# Altium PCB PCB_Testplatine.PcbDoc (part 3 of 3)
Units mm, origin at the board's own origin, x right, y up, seen from the top; angles counter-clockwise.
Board outline 124.77 x 137.35 mm, 2 copper layers (Top Layer, Bottom Layer); 215 components, 185 nets, 1105 pads, 469 vias.
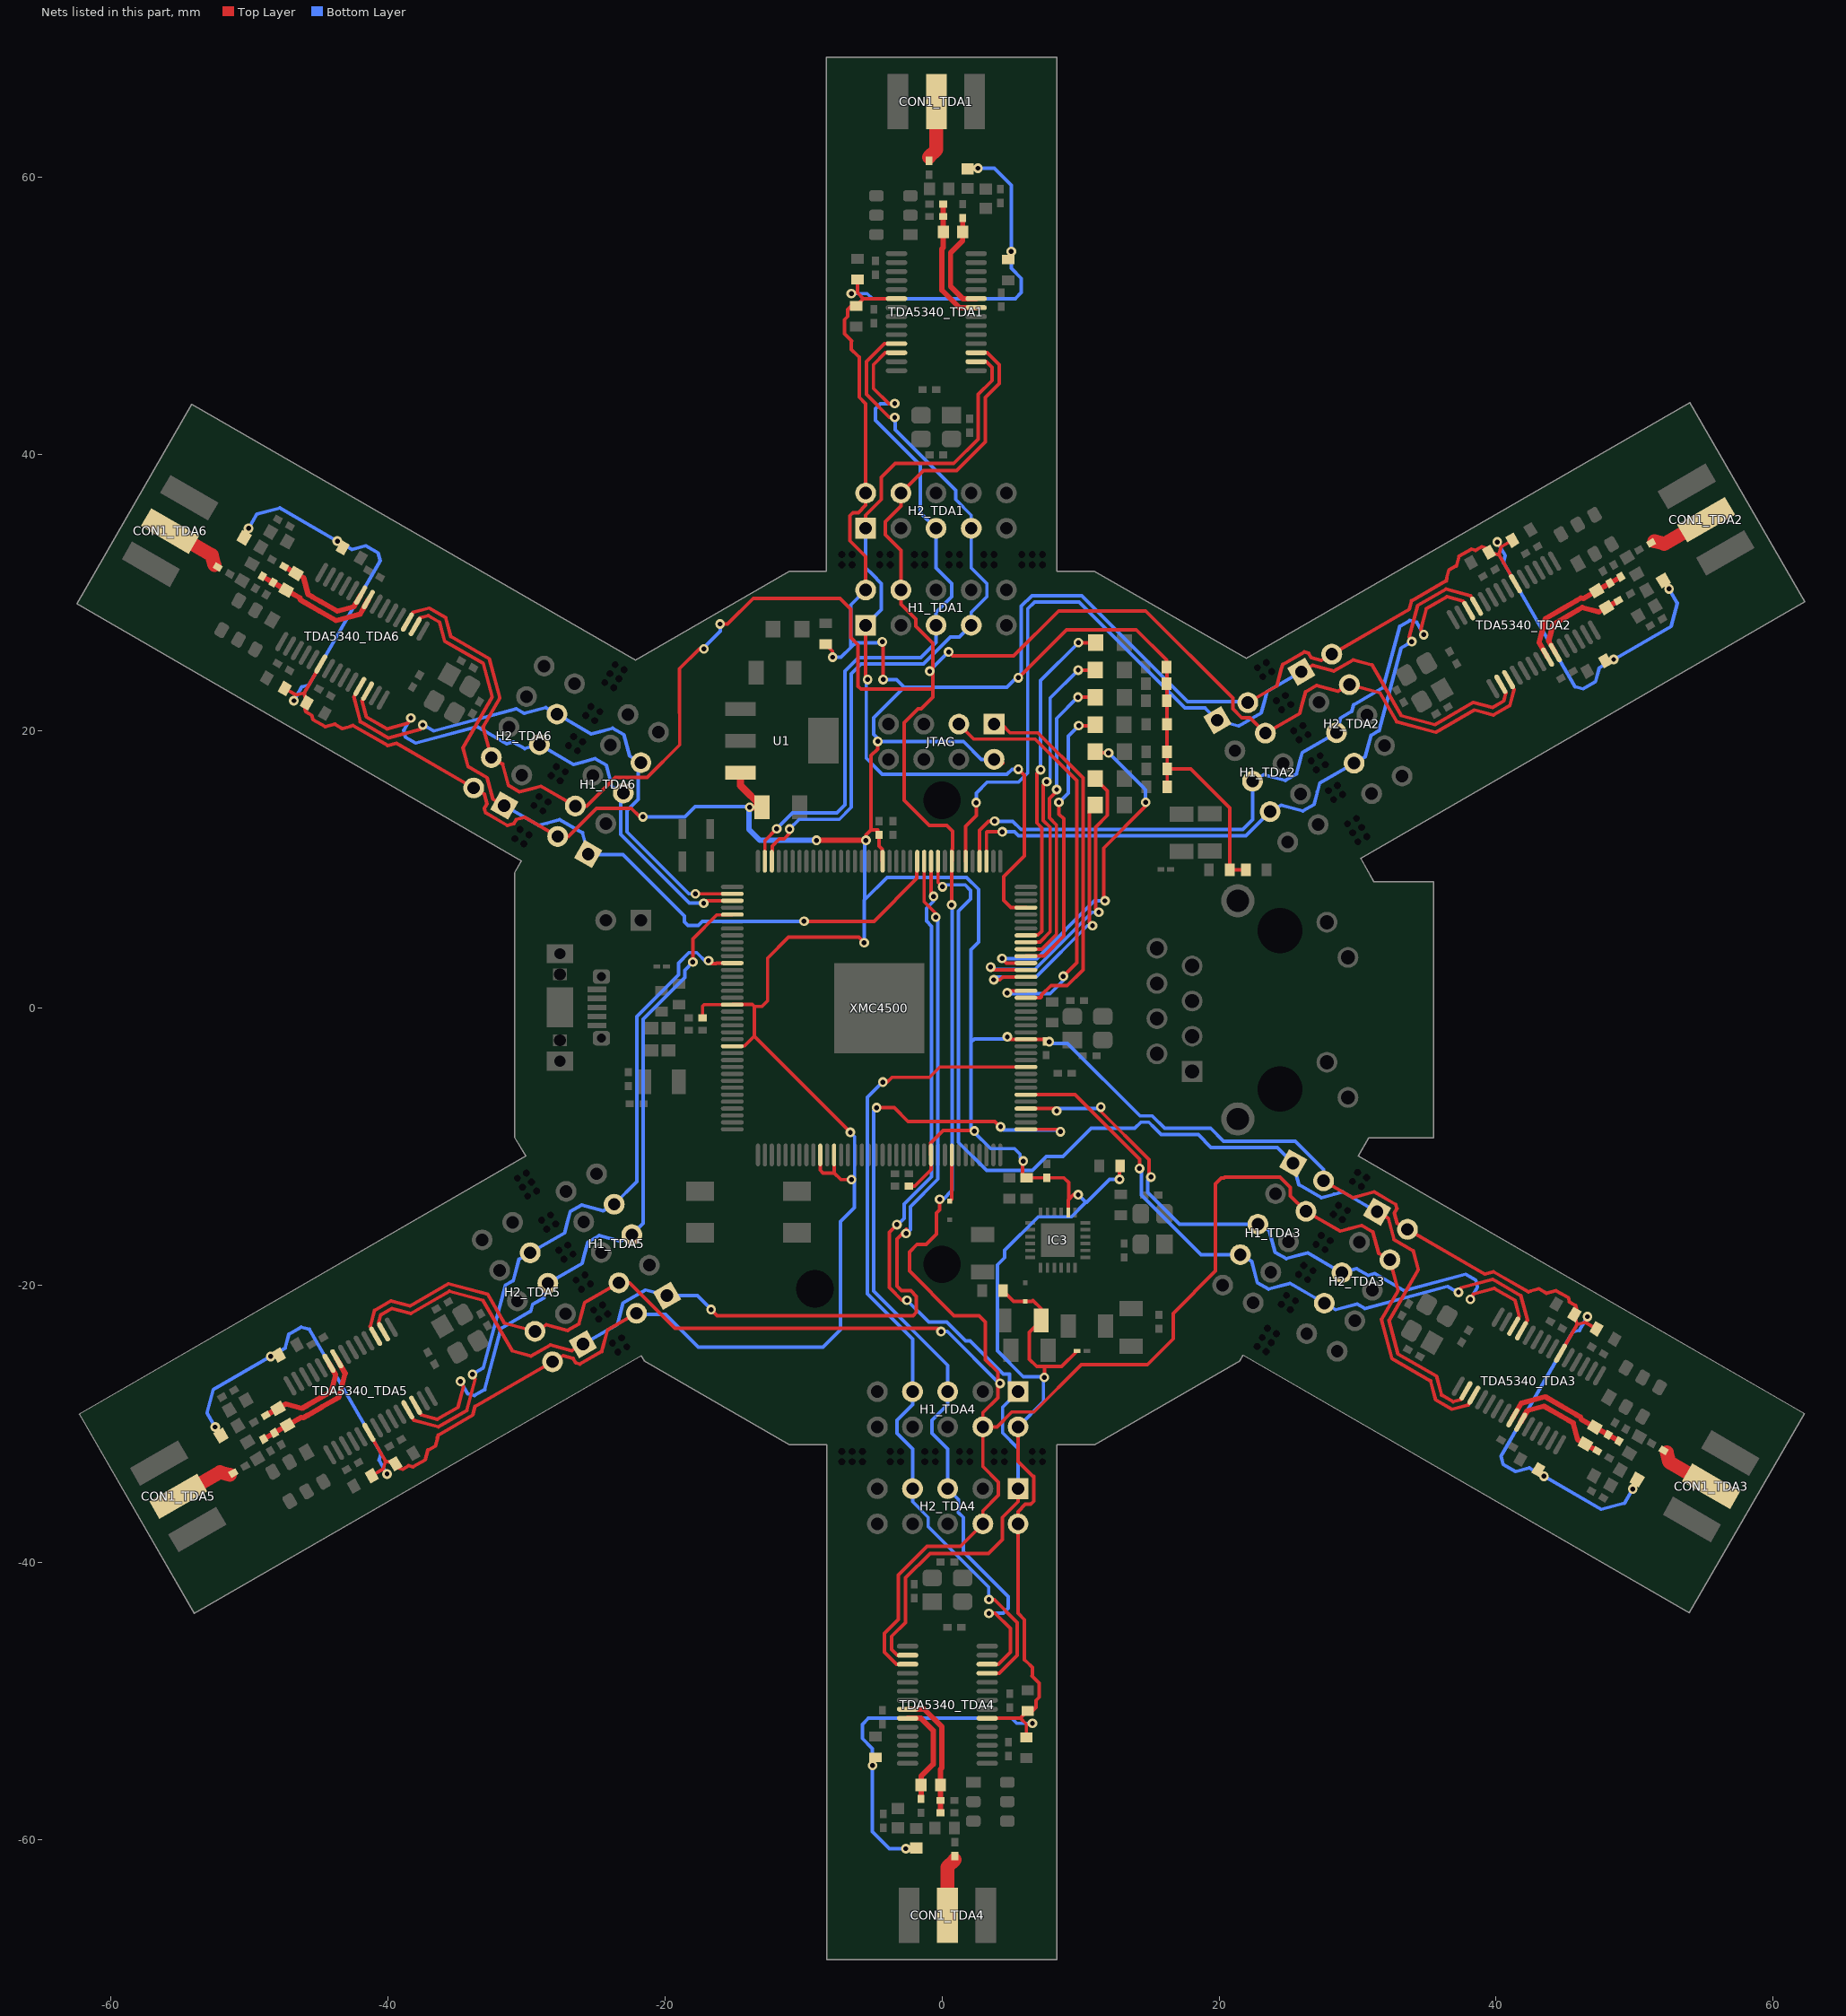
[diagram p3: the nets of this part, all layers, seen from the top]

## Via types
v1: diameter 0.7, hole 0.35, Top Layer to Bottom Layer, 421 vias
v2: diameter 0.5, hole 0.35, Top Layer to Bottom Layer, 36 vias
v3: diameter 2.7, hole 2.5, Top Layer to Bottom Layer, 12 vias

## Nets (pads, with @x,y where several pads share a name; then routed paths per layer and width w, separated by ;. In a path a pad name is that pad's centre, name@x,y a point inside that pad or via, vN(x,y) a via of type N, cw(c..) or ccw(c..) an arc to the next point about the centre after c; other vN are vias at no path point) (continued)
PP1_TDA1: H1_TDA1.7 H2_TDA1.7 TDA5340_TDA1.11 XMC4500.142 | length 54.2
  Top Layer w0.254: XMC4500.142@-12.3,10.6 -12.277,10.623 -12.277,11.69 -11.761,12.206 -11.406,12.206 -11.02,12.592 v1(-11.02,12.92) ; v1(-3.42,42.64) -3.802,42.64 -5.467,44.305 -5.467,46.666 -4.168,47.965 TDA5340_TDA1.11@-3.295,47.965
  Bottom Layer w0.254: v1(-11.02,12.92) -10.313,13.627 -7.424,13.627 -6.554,14.497 -6.554,24.145 -5.848,24.851 -1.346,24.851 0.59,26.787 1.247,26.787 H1_TDA1.7@2.1,27.64 2.1,28.581 3.231,29.712 3.231,30.648 2.1,31.779 H2_TDA1.7@2.1,34.64 2.1,35.581 0.969,36.712 0.969,37.37 -3.401,41.74 v1@-3.401,42.62 ; v1@-3.42,42.321 v1(-3.42,42.64)
PP1_TDA2: H1_TDA2.7 H2_TDA2.7 TDA5340_TDA2.11 XMC4500.111 | length 49.8
  Top Layer w0.254: XMC4500.111@3.2,10.6 3.2,12.69 3.24,12.73 v1(4.34,12.73) ; v1(33.911,26.46) 33.72,26.791 34.329,29.066 36.374,30.246 38.148,29.771 TDA5340_TDA2.11@38.585,29.014
  Bottom Layer w0.254: v1(4.34,12.73) 5.21,12.73 5.506,12.434 21.935,12.434 H1_TDA2.7@23.68,14.18 24.495,14.65 26.04,14.236 26.851,14.704 27.094,15.609 27.265,16.249 H2_TDA2.7@29.742,17.68 30.557,18.15 30.971,19.695 31.542,20.024 33.141,25.993 v1@33.904,26.434 ; v1@33.634,26.3 v1(33.911,26.46)
PP1_TDA3: H1_TDA3.7 H2_TDA3.7 TDA5340_TDA3.11 XMC4500.78 | length 48
  Top Layer w0.254: XMC4500.78@6.05,-6.25 9.605,-6.25 14.25,-10.895 v1(14.25,-11.58) ; v1(37.28,-20.52) 37.471,-20.189 39.746,-19.58 41.791,-20.76 42.266,-22.534 TDA5340_TDA3.11@41.829,-23.291
  Bottom Layer w0.254: v1(14.25,-11.58) 14.397,-11.727 14.397,-13.495 18.702,-17.8 H1_TDA3.7@21.53,-17.8 22.345,-18.271 22.758,-19.816 23.57,-20.284 24.475,-20.042 25.115,-19.87 H2_TDA3.7@27.592,-21.3 28.407,-21.771 29.952,-21.357 30.522,-21.686 36.491,-20.087 v1@37.254,-20.527 ; v1@37.004,-20.36 v1(37.28,-20.52)
PP1_TDA4: H1_TDA4.7 H2_TDA4.7 TDA5340_TDA4.11 XMC4500.82 | length 61.3
  Top Layer w0.254: v1(-4.28,-5.34) -3.965,-5.34 -3.621,-4.996 -3.615,-4.996 -3.613,-4.994 -0.912,-4.994 -0.168,-4.25 XMC4500.82@6.05,-4.25 ; TDA5340_TDA4.11@3.255,-48.015 4.128,-48.015 5.427,-46.716 5.427,-44.355 3.762,-42.69 v1(3.38,-42.69)
  Bottom Layer w0.254: v1(-4.28,-5.34) -4.307,-5.34 -5.411,-6.444 -5.411,-20.623 -2.14,-23.894 -2.14,-28.631 -3.271,-29.762 -3.271,-30.698 -2.14,-31.829 -2.14,-35.631 -1.009,-36.762 -1.009,-37.42 3.361,-41.79 v1@3.361,-42.67 ; v1(3.38,-42.69) v1@3.38,-42.371
PP1_TDA5: H1_TDA5.7 H2_TDA5.7 TDA5340_TDA5.11 XMC4500.12 | length 50.3
  Top Layer w0.254: TDA5340_TDA5.11@-38.584,-28.996 -38.148,-29.752 -36.374,-30.227 -34.329,-29.047 -33.72,-26.772 v1(-33.91,-26.441) ; v1(-16.87,3.43) -16.644,3.204 -16.336,3.204 -16.29,3.25 XMC4500.12@-15.15,3.25
  Bottom Layer w0.254: v1(-33.91,-26.441) v1@-33.634,-26.282 ; v1@-33.903,-26.415 -33.141,-25.974 -31.541,-20.006 -30.971,-19.676 -30.557,-18.131 H2_TDA5.7@-29.742,-17.661 -27.265,-16.231 -27.093,-15.591 -26.851,-14.686 -26.039,-14.217 -24.495,-14.631 H1_TDA5.7@-23.68,-14.161 -22.048,-12.529 -22.048,-0.61 -19.044,2.394 -19.044,3.243 -18.28,4.007 -17.72,4.007 -17.034,3.321 -16.979,3.321 v1(-16.87,3.43)
PP1_TDA6: H1_TDA6.7 H2_TDA6.7 TDA5340_TDA6.11 XMC4500.2 | length 41.2
  Top Layer w0.254: TDA5340_TDA6.11@-42.049,23.211 -42.486,22.454 -42.011,20.68 -39.966,19.5 -37.691,20.109 v1(-37.5,20.44) ; v1(-17.82,8.25) XMC4500.2@-15.15,8.25
  Bottom Layer w0.254: v1(-37.5,20.44) v1@-37.224,20.28 ; v1@-37.474,20.447 -36.711,20.007 -30.742,21.606 -30.172,21.277 -28.627,21.691 H2_TDA6.7@-27.812,21.22 -25.335,19.79 -24.695,19.962 -23.79,20.204 -22.978,19.736 -22.565,18.191 H1_TDA6.7@-21.75,17.72 -21.943,17.527 -21.943,15.074 -22.751,14.266 -22.751,12.719 -18.282,8.25 v1(-17.82,8.25)
PP2_TDA1: H1_TDA1.5 H2_TDA1.5 TDA5340_TDA1.12 XMC4500.143 | length 52.3
  Top Layer w0.254: XMC4500.143@-12.8,10.6 -12.8,12.097 v1(-11.947,12.95) ; v1(-3.42,43.64) -3.857,43.64 -4.959,44.742 -4.959,46.456 -4.1,47.315 TDA5340_TDA1.12@-3.295,47.315
  Bottom Layer w0.254: v1(-11.947,12.95) -10.816,14.081 -7.612,14.081 -7.008,14.685 -7.008,24.333 -6.037,25.305 -1.535,25.305 -0.44,26.399 H1_TDA1.5@-0.44,27.64 -0.44,28.581 0.691,29.712 0.691,30.648 -0.44,31.779 H2_TDA1.5@-0.44,34.64 -1.571,35.771 -1.571,39.191 -4.812,42.432 -4.812,43.274 -4.446,43.64 v1(-3.42,43.64)
PP2_TDA2: H1_TDA2.5 H2_TDA2.5 TDA5340_TDA2.12 XMC4500.112 | length 51.2
  Top Layer w0.254: XMC4500.112@2.7,10.6 2.7,12.832 3.358,13.49 v1(3.79,13.49) ; v1(34.777,26.96) 34.558,27.338 34.962,28.844 36.446,29.701 37.619,29.386 TDA5340_TDA2.12@38.022,28.689
  Bottom Layer w0.254: v1(3.79,13.49) 5.092,13.49 5.694,12.888 21.703,12.888 22.41,13.595 H1_TDA2.5@22.41,16.379 23.225,16.85 24.77,16.436 25.581,16.904 25.824,17.809 25.995,18.449 H2_TDA2.5@28.472,19.879 28.758,20.945 29.572,21.415 29.701,21.895 31.848,23.134 33.035,27.562 33.764,27.983 34.264,27.849 v1(34.777,26.96)
PP2_TDA3: H1_TDA3.5 H2_TDA3.5 TDA5340_TDA3.12 XMC4500.76 | length 48.1
  Top Layer w0.254: XMC4500.76@6.05,-7.25 6.06,-7.26 8.27,-7.26 v1(8.27,-7.43) ; v1(11.46,-7.14) 11.358,-7.242 11.358,-7.362 14.927,-10.93 14.927,-12.049 v1(15.074,-12.196) ; v1(38.146,-21.02) 38.365,-20.641 39.87,-20.238 41.354,-21.095 41.669,-22.269 TDA5340_TDA3.12@41.267,-22.966
  Bottom Layer w0.254: v1(8.27,-7.43) 8.27,-7.39 8.42,-7.24 11.36,-7.24 v1(11.46,-7.14) ; v1(15.074,-12.196) 14.851,-12.419 14.851,-13.307 17.145,-15.601 H1_TDA3.5@22.8,-15.601 23.615,-16.071 24.028,-17.616 24.84,-18.084 25.745,-17.842 26.385,-17.67 H2_TDA3.5@28.862,-19.101 29.928,-18.815 30.742,-19.285 31.222,-19.157 33.369,-20.397 37.796,-19.21 38.526,-19.631 38.659,-20.131 v1(38.146,-21.02)
PP2_TDA4: H1_TDA4.5 H2_TDA4.5 TDA5340_TDA4.12 XMC4500.73 | length 65.1
  Top Layer w0.254: v1(-4.73,-7.19) -3.46,-7.19 -2.47,-8.18 3.79,-8.18 4.18,-8.57 v1(4.22,-8.57) ; TDA5340_TDA4.12@3.255,-47.365 4.06,-47.365 4.919,-46.506 4.919,-44.792 3.817,-43.69 v1(3.38,-43.69) ; XMC4500.73@6.05,-8.75 8.45,-8.75 8.538,-8.838 v1(8.538,-8.927)
  Bottom Layer w0.254: v1(-4.73,-7.19) -4.957,-7.417 -4.957,-20.435 0.396,-25.788 0.396,-27.686 H1_TDA4.5@0.4,-27.69 0.4,-28.631 -0.731,-29.762 -0.731,-30.698 0.4,-31.829 H2_TDA4.5@0.4,-34.69 1.18,-35.47 1.18,-36.411 1.531,-36.762 1.531,-39.241 4.772,-42.482 4.772,-43.324 4.406,-43.69 v1(3.38,-43.69) ; v1(4.22,-8.57) 4.22,-8.6 4.42,-8.8 8.411,-8.8 v1(8.538,-8.927)
PP2_TDA5: H1_TDA5.5 H2_TDA5.5 TDA5340_TDA5.12 XMC4500.5 | length 52.4
  Top Layer w0.254: TDA5340_TDA5.12@-38.022,-28.671 -37.619,-29.367 -36.445,-29.682 -34.961,-28.825 -34.558,-27.32 v1(-34.776,-26.941) ; v1(-18,3.33) -18,5.008 -16.281,6.727 XMC4500.5@-15.173,6.727
  Bottom Layer w0.254: v1(-34.776,-26.941) -34.263,-27.83 -33.764,-27.964 -33.034,-27.543 -31.848,-23.116 -29.701,-21.876 -29.572,-21.396 -28.758,-20.926 H2_TDA5.5@-28.472,-19.861 -25.995,-18.43 -25.823,-17.79 -25.581,-16.885 -24.769,-16.417 -23.225,-16.831 H1_TDA5.5@-22.41,-16.361 -21.594,-15.545 -21.594,-0.798 -18.59,2.206 -18.59,2.74 v1(-18,3.33)
PP2_TDA6: H1_TDA6.5 H2_TDA6.5 TDA5340_TDA6.12 XMC4500.3 | length 38.8
  Top Layer w0.254: TDA5340_TDA6.12@-41.487,22.886 -41.889,22.189 -41.574,21.015 -40.09,20.158 -38.585,20.561 v1(-38.366,20.94) ; v1(-17.22,7.57) -17.04,7.75 XMC4500.3@-15.15,7.75
  Bottom Layer w0.254: v1(-38.366,20.94) -38.879,20.051 -38.746,19.551 -38.016,19.13 -33.589,20.317 -31.442,19.077 -30.962,19.205 -30.148,18.735 H2_TDA6.5@-29.082,19.021 -26.605,17.59 -25.965,17.762 -25.06,18.004 -24.248,17.536 -23.835,15.991 -23.205,15.627 -23.205,12.531 -18.247,7.573 -17.455,7.573 -17.381,7.646 -17.296,7.646 v1(-17.22,7.57)
RESET#: D200.1 XMC4500.65 | length 3.4
  Top Layer w0.254: D200.1@0.55,-13.928 0.7,-13.778 XMC4500.65@0.7,-10.6
RF_TDA1: C31_TDA1.2 CON1_TDA1.1 | length 4.5
  Top Layer w0.254: C31_TDA1.2@-0.95,61.16 C31_TDA1.2@-0.95,61.43
  Top Layer w1: C31_TDA1.2@-0.95,61.43 -0.42,61.96 CON1_TDA1.1@-0.42,65.44
RF_TDA2: C31_TDA2.2 CON1_TDA2.1 | length 4.5
  Top Layer w0.254: C31_TDA2.2@51.184,33.581 C31_TDA2.2@51.418,33.716
  Top Layer w1: C31_TDA2.2@51.418,33.716 52.142,33.522 CON1_TDA2.1@55.156,35.262
RF_TDA3: C31_TDA3.2 CON1_TDA3.1 | length 4.5
  Top Layer w0.254: C31_TDA3.2@52.084,-31.919 C31_TDA3.2@52.318,-32.054
  Top Layer w1: C31_TDA3.2@52.318,-32.054 52.512,-32.778 CON1_TDA3.1@55.526,-34.518
RF_TDA4: C31_TDA4.2 CON1_TDA4.1 | length 4.5
  Top Layer w0.254: C31_TDA4.2@0.91,-61.48 C31_TDA4.2@0.91,-61.21
  Top Layer w1: CON1_TDA4.1@0.38,-65.49 0.38,-62.01 C31_TDA4.2@0.91,-61.48
RF_TDA5: C31_TDA5.2 CON1_TDA5.1 | length 4.5
  Top Layer w0.254: C31_TDA5.2@-51.418,-33.697 C31_TDA5.2@-51.184,-33.562
  Top Layer w1: CON1_TDA5.1@-55.156,-35.243 -52.142,-33.503 C31_TDA5.2@-51.418,-33.697
RF_TDA6: C31_TDA6.2 CON1_TDA6.1 | length 4.5
  Top Layer w0.254: C31_TDA6.2@-52.538,31.974 C31_TDA6.2@-52.304,31.839
  Top Layer w1: CON1_TDA6.1@-55.746,34.438 -52.732,32.698 C31_TDA6.2@-52.538,31.974
RX_TDA1_N: C28_TDA1.1 C29_TDA1.2 L1_TDA1.2 TDA5340_TDA1.22 | length 9.3
  Top Layer w0.381: C29_TDA1.2@0.08,58.04 C28_TDA1.1@0.08,57.14 0.08,56.699 L1_TDA1.2@0.08,56.04 0.08,54.898 -0.025,54.793 -0.025,54.408 -0.026,54.407 -0.026,53.223 -0.025,53.222 -0.025,51.831 1.241,50.565 TDA5340_TDA1.22@2.455,50.565
RX_TDA1_P: C27_TDA1.2 L1_TDA1.1 TDA5340_TDA1.23 | length 7.6
  Top Layer w0.381: 1.48,56.549 1.48,56.68 ; C27_TDA1.2@1.48,57.04 1.48,56.68 ; TDA5340_TDA1.23@2.455,51.215 1.49,51.215 0.61,52.095 0.61,53.485 0.609,53.486 0.609,54.144 0.61,54.145 0.61,54.529 1.48,55.399 L1_TDA1.1@1.48,56.04 1.48,56.68
RX_TDA2_N: C28_TDA2.1 C29_TDA2.2 L1_TDA2.2 TDA5340_TDA2.22 | length 9.3
  Top Layer w0.381: TDA5340_TDA2.22@43.711,25.335 43.105,26.386 43.568,28.116 44.772,28.811 44.773,28.812 45.798,29.405 45.8,29.404 46.133,29.596 46.276,29.558 L1_TDA2.2@47.265,30.129 47.837,30.459 C28_TDA2.1@48.218,30.679 C29_TDA2.2@48.997,31.129
RX_TDA2_P: C27_TDA2.2 L1_TDA2.1 TDA5340_TDA2.23 | length 7.6
  Top Layer w0.381: TDA5340_TDA2.23@44.274,25.66 43.792,26.496 44.114,27.697 45.317,28.392 45.318,28.394 45.888,28.723 45.89,28.723 46.222,28.915 47.411,28.596 L1_TDA2.1@47.965,28.917 48.52,29.237 ; 48.407,29.171 48.52,29.237 ; C27_TDA2.2@48.831,29.417 48.52,29.237
RX_TDA3_N: C28_TDA3.1 C29_TDA3.2 L1_TDA3.2 TDA5340_TDA3.22 | length 9.3
  Top Layer w0.381: TDA5340_TDA3.22@41.206,-29.57 41.813,-28.519 43.543,-28.056 44.747,-28.751 44.749,-28.75 45.774,-29.343 45.775,-29.344 46.107,-29.536 46.146,-29.68 L1_TDA3.2@47.135,-30.251 47.706,-30.581 C28_TDA3.1@48.088,-30.801 C29_TDA3.2@48.867,-31.251
RX_TDA3_P: C27_TDA3.2 L1_TDA3.1 TDA5340_TDA3.23 | length 7.6
  Top Layer w0.381: TDA5340_TDA3.23@41.769,-29.895 42.252,-29.059 43.453,-28.737 44.657,-29.432 44.659,-29.432 45.229,-29.761 45.229,-29.763 45.562,-29.955 45.88,-31.143 L1_TDA3.1@46.435,-31.463 46.99,-31.784 ; 46.876,-31.718 46.99,-31.784 ; C27_TDA3.2@47.301,-31.963 46.99,-31.784
RX_TDA4_N: C28_TDA4.1 C29_TDA4.2 L1_TDA4.2 TDA5340_TDA4.22 | length 9.3
  Top Layer w0.381: TDA5340_TDA4.22@-2.495,-50.615 -1.281,-50.615 -0.015,-51.881 -0.015,-53.272 -0.014,-53.273 -0.014,-54.457 -0.015,-54.458 -0.015,-54.843 -0.12,-54.948 L1_TDA4.2@-0.12,-56.09 -0.12,-56.749 C28_TDA4.1@-0.12,-57.19 C29_TDA4.2@-0.12,-58.09
RX_TDA4_P: C27_TDA4.2 L1_TDA4.1 TDA5340_TDA4.23 | length 7.6
  Top Layer w0.381: TDA5340_TDA4.23@-2.495,-51.265 -1.53,-51.265 -0.65,-52.145 -0.65,-53.535 -0.649,-53.536 -0.649,-54.194 -0.65,-54.195 -0.65,-54.579 -1.52,-55.449 L1_TDA4.1@-1.52,-56.09 -1.52,-56.73 ; C27_TDA4.2@-1.52,-57.09 -1.52,-56.73 ; -1.52,-56.599 -1.52,-56.73
RX_TDA5_N: C28_TDA5.1 C29_TDA5.2 L1_TDA5.2 TDA5340_TDA5.22 | length 9.3
  Top Layer w0.381: C29_TDA5.2@-48.997,-31.11 C28_TDA5.1@-48.218,-30.66 -47.836,-30.44 L1_TDA5.2@-47.265,-30.11 -46.276,-29.539 -46.132,-29.577 -45.8,-29.385 -45.798,-29.386 -44.772,-28.794 -44.772,-28.792 -43.568,-28.097 -43.104,-26.367 TDA5340_TDA5.22@-43.711,-25.316
RX_TDA5_P: C27_TDA5.2 L1_TDA5.1 TDA5340_TDA5.23 | length 7.6
  Top Layer w0.381: C27_TDA5.2@-48.831,-29.398 -48.52,-29.218 ; -48.406,-29.153 -48.52,-29.218 ; TDA5340_TDA5.23@-44.274,-25.641 -43.791,-26.477 -44.113,-27.679 -45.317,-28.374 -45.318,-28.375 -45.888,-28.704 -45.889,-28.704 -46.222,-28.896 -47.41,-28.578 L1_TDA5.1@-47.965,-28.898 -48.52,-29.218
RX_TDA6_N: C28_TDA6.1 C29_TDA6.2 L1_TDA6.2 TDA5340_TDA6.22 | length 9.3
  Top Layer w0.381: C29_TDA6.2@-49.087,31.171 C28_TDA6.1@-48.308,30.721 -47.926,30.501 L1_TDA6.2@-47.355,30.171 -46.366,29.6 -46.327,29.456 -45.995,29.264 -45.994,29.263 -44.969,28.67 -44.967,28.671 -43.763,27.976 -42.033,28.439 TDA5340_TDA6.22@-41.426,29.49
RX_TDA6_P: C27_TDA6.2 L1_TDA6.1 TDA5340_TDA6.23 | length 7.6
  Top Layer w0.381: C27_TDA6.2@-47.521,31.883 -47.21,31.704 ; -47.096,31.638 -47.21,31.704 ; TDA5340_TDA6.23@-41.989,29.815 -42.472,28.979 -43.673,28.657 -44.877,29.352 -44.879,29.352 -45.449,29.681 -45.449,29.683 -45.782,29.875 -46.1,31.063 L1_TDA6.1@-46.655,31.383 -47.21,31.704
SCK_TDA1: H1_TDA1.4 H1_TDA2.4 H1_TDA3.4 H1_TDA4.4 H1_TDA5.4 H1_TDA6.4 H2_TDA1.4 H2_TDA2.4 H2_TDA3.4 H2_TDA4.4 H2_TDA5.4 H2_TDA6.4 TDA5340_TDA1.17 TDA5340_TDA2.17 TDA5340_TDA3.17 TDA5340_TDA4.17 TDA5340_TDA5.17 TDA5340_TDA6.17 XMC4500.116 | length 351.6
  Top Layer w0.254: TDA5340_TDA5.17@-40.897,-23.691 -41.299,-22.994 -40.984,-21.82 -39.798,-21.135 -38.432,-21.501 -35.649,-19.894 -32.82,-20.652 -31.616,-22.737 H2_TDA5.4@-29.402,-23.33 -28.587,-22.86 -27.042,-23.274 -26.231,-22.806 -25.988,-21.901 -25.817,-21.261 H1_TDA5.4@-23.34,-19.83 -22.561,-19.83 -19.281,-23.11 -0.32,-23.11 v1(-0.08,-23.35) ; TDA5340_TDA6.17@-38.612,27.865 -38.209,28.562 -37.035,28.877 -35.849,28.192 -35.483,26.826 -32.7,25.219 -31.942,22.39 -33.145,20.305 H2_TDA6.4@-32.552,18.091 -31.737,17.621 -31.323,16.076 -30.512,15.607 -29.607,15.85 -28.967,16.021 H1_TDA6.4@-26.49,14.591 -25.659,14.591 -23.607,16.643 -21.304,16.643 -18.949,18.998 -18.949,21.294 -18.956,21.301 -18.956,24.504 -17.535,25.925 v1(-17.205,25.925) ; v1(-16.03,27.725) -15.49,27.725 -13.642,29.573 -7.369,29.573 -6.597,28.801 -6.597,26.755 -6.065,26.223 -6.065,23.239 -5.866,23.04 -0.674,23.04 ; TDA5340_TDA4.17@-2.495,-47.365 -3.3,-47.365 -4.159,-46.506 -4.159,-45.136 -3.159,-44.136 -3.159,-40.922 -1.088,-38.851 1.319,-38.851 H2_TDA4.4@2.94,-37.23 2.94,-36.289 4.071,-35.158 4.071,-34.222 2.94,-33.091 H1_TDA4.4@2.94,-30.23 ; v1(-0.9,24.32) v1@-0.69,24.32 ; v1(-0.18,-13.81) -0.18,-14.554 -0.406,-14.78 -0.406,-16.325 -1.152,-17.071 -1.822,-17.071 -2.362,-17.611 -2.362,-18.978 0.862,-22.202 2.67,-22.202 3.119,-22.651 3.119,-25.373 4.017,-26.271 4.017,-28.136 2.94,-29.213 H1_TDA4.4@2.94,-30.23 ; v1(0.47,25.71) 0.75,25.43 4.847,25.43 5.163,25.43 8.413,28.68 14.697,28.68 20.993,22.384 20.993,21.603 21.624,20.972 22.217,20.972 H1_TDA2.4@23.34,19.849 25.817,21.279 25.989,21.919 26.231,22.824 27.043,23.293 28.588,22.879 H2_TDA2.4@29.402,23.349 31.616,22.756 32.82,20.671 35.649,19.913 38.433,21.52 39.799,21.154 40.985,21.839 41.299,23.013 TDA5340_TDA2.17@40.897,23.71 ; v1(0.68,7.45) 0.703,7.473 0.703,10.597 XMC4500.116@0.7,10.6 ; XMC4500.116@0.723,10.623 0.723,11.473 0.746,11.496 0.746,12.771 0.34,13.177 -0.937,13.177 -2.75,14.99 -2.75,20.603 -1.74,21.613 -1.52,21.613 -0.674,22.459 -0.674,23.04 ; TDA5340_TDA1.17@2.455,47.315 3.26,47.315 4.119,46.456 4.119,45.086 3.119,44.086 3.119,40.872 1.048,38.801 -1.359,38.801 H2_TDA1.4@-2.98,37.18 -2.98,36.239 -4.111,35.108 -4.111,34.172 -2.98,33.041 H1_TDA1.4@-2.98,30.18 -2.98,29.163 -1.903,28.086 -1.903,27.553 -0.674,26.324 -0.674,23.04 ; TDA5340_TDA3.17@38.392,-27.945 37.989,-28.642 36.815,-28.957 35.629,-28.272 35.263,-26.906 32.48,-25.299 31.722,-22.47 32.925,-20.385 H2_TDA3.4@32.332,-18.171 31.517,-17.701 31.103,-16.156 30.292,-15.687 29.387,-15.93 28.747,-16.101 H1_TDA3.4@26.27,-14.671 25.147,-13.548 25.147,-12.955 24.405,-12.213 20.394,-12.213 20.34,-12.267 20.161,-12.267 19.738,-12.69 19.738,-18.977 16.681,-22.034 16.681,-23.873 14.823,-25.731 10.053,-25.731 6.631,-29.153 5.034,-29.153 3.957,-30.23 H1_TDA4.4@2.94,-30.23
  Bottom Layer w0.254: v1(-17.205,25.925) -17.325,25.925 -16.03,27.22 v1(-16.03,27.725) ; v1(-0.9,24.32) -0.92,24.32 v1(0.47,25.71) ; v1(-0.18,-13.81) 0.072,-13.81 0.73,-13.152 0.73,-10.36 0.733,-10.357 0.733,7.397 v1(0.68,7.45) ; v1(-0.08,-23.35) 0.38,-23.35 4.122,-27.092 v1(4.18,-27.092)
SELECT1: H1_TDA1.1 H2_TDA1.1 TDA5340_TDA1.16 XMC4500.105 | length 60.6
  Top Layer w0.254: H1_TDA1.1@-5.52,27.64 -5.52,23.86 v1(-5.38,23.72) ; H2_TDA1.1@-5.52,34.64 -5.52,35.581 -4.389,36.712 -4.389,38.309 -3.389,39.309 0.838,39.309 2.611,41.082 2.611,44.297 3.611,45.297 3.611,46.245 3.191,46.665 TDA5340_TDA1.16@2.455,46.665 ; v1@5.46,17.288 5.927,16.821 5.927,12.987 5.93,12.984 5.93,10.98 4.444,9.494 4.444,7.789 4.96,7.273 XMC4500.105@6.073,7.273
  Bottom Layer w0.254: H1_TDA1.1@-5.52,27.64 -4.389,28.771 -4.389,30.648 -5.052,31.311 -5.52,31.779 H2_TDA1.1@-5.52,34.64 ; v1(-5.38,23.72) -5.48,23.62 -5.48,18.047 -4.316,16.883 4.683,16.883 5.044,17.244 v1(5.504,17.244)
SELECT2: H1_TDA2.1 H2_TDA2.1 TDA5340_TDA2.16 XMC4500.114 | length 66
  Top Layer w0.254: XMC4500.114@1.7,10.6 1.7,13.132 2.46,13.892 v1(2.46,14.83) ; H2_TDA2.1@25.932,24.279 26.747,24.749 28.292,24.335 29.675,25.134 31.041,24.768 33.155,21.107 35.577,20.458 38.361,22.065 39.727,21.699 40.548,22.174 40.702,22.747 TDA5340_TDA2.16@40.334,23.385
  Bottom Layer w0.254: v1(2.46,14.83) 2.46,15.517 3.253,16.31 5.528,16.31 6.181,16.963 6.181,28.838 6.669,29.326 9.892,29.326 17.542,21.676 18.973,21.676 H1_TDA2.1@19.87,20.779 21.415,20.365 23.041,21.304 23.284,22.209 23.455,22.849 H2_TDA2.1@25.932,24.279
SELECT3: H1_TDA3.1 H2_TDA3.1 TDA5340_TDA3.16 XMC4500.118 | length 77.6
  Top Layer w0.254: XMC4500.118@-0.3,10.6 -0.3,9.08 v1(0.02,8.76) ; H2_TDA3.1@31.402,-14.701 32.217,-15.171 32.631,-16.716 34.014,-17.515 34.38,-18.881 32.267,-22.542 32.916,-24.964 35.7,-26.571 36.066,-27.937 36.887,-28.412 37.46,-28.258 TDA5340_TDA3.16@37.829,-27.62
  Bottom Layer w0.254: v1(0.02,8.76) 0.157,8.897 1.66,8.897 2.057,8.5 2.057,7.87 1.187,6.999 1.187,-9.69 3.217,-11.72 6.523,-11.72 7.52,-10.723 8.727,-10.723 10.768,-8.682 13.901,-8.682 14.35,-8.233 14.92,-8.233 15.317,-8.63 15.317,-8.637 15.816,-9.136 18.501,-9.136 19.42,-10.055 24.194,-10.055 H1_TDA3.1@25.34,-11.201 25.754,-12.746 27.38,-13.685 28.285,-13.442 28.925,-13.271 H2_TDA3.1@31.402,-14.701
SELECT4: H1_TDA4.1 H2_TDA4.1 TDA5340_TDA4.16 XMC4500.119 | length 72.6
  Top Layer w0.254: v1(-3.27,-15.63) -3.82,-16.18 -3.82,-20.162 -2.892,-21.09 ; TDA5340_TDA4.16@-2.495,-46.715 -3.231,-46.715 -3.651,-46.295 -3.651,-45.347 -2.651,-44.347 -2.651,-41.132 -0.878,-39.359 3.349,-39.359 4.349,-38.359 4.349,-36.762 5.48,-35.631 H2_TDA4.1@5.48,-34.69 ; XMC4500.119@-0.8,10.6 -0.8,8.239 v1(-0.623,8.062)
  Bottom Layer w0.254: v1(-3.27,-15.63) -3.21,-15.63 -2.751,-15.171 -2.751,-14.139 -0.769,-12.157 -0.769,5.911 -1.137,6.28 -1.137,7.213 -0.623,7.727 v1(-0.623,8.062) ; v1(-2.54,-21.09) -0.957,-22.673 0.345,-22.673 1.699,-24.027 2.015,-24.027 4.403,-26.415 4.857,-26.415 4.857,-27.067 H1_TDA4.1@5.48,-27.69 ; H2_TDA4.1@5.48,-34.69 5.48,-31.785 4.368,-30.672 4.365,-30.675 4.365,-28.805 H1_TDA4.1@5.48,-27.69 ; H1_TDA4.1@5.48,-27.114 H1_TDA4.1@5.48,-27.69
SELECT5: H1_TDA5.1 H2_TDA5.1 TDA5340_TDA5.16 XMC4500.120 | length 81.6
  Top Layer w0.254: TDA5340_TDA5.16@-40.334,-23.366 -40.702,-22.728 -40.548,-22.155 -39.727,-21.681 -38.361,-22.047 -35.577,-20.439 -33.155,-21.088 -31.041,-24.749 -29.675,-25.115 -28.292,-24.316 -26.747,-24.73 H2_TDA5.1@-25.932,-24.26 ; v1(-16.68,-21.76) -16.24,-22.2 -2.1,-22.2 -1.863,-21.963 -1.863,-20.81 -2.27,-20.403 -2.937,-20.403 -3.27,-20.07 -3.27,-16.66 -2.578,-15.968 -2.578,-16.228 v1(-2.61,-16.26) ; XMC4500.120@-1.3,10.6 -1.3,7.69 -0.46,6.85 v1(-0.46,6.56)
  Bottom Layer w0.254: H2_TDA5.1@-25.932,-24.26 -23.455,-22.83 -23.283,-22.19 -23.041,-21.285 -21.415,-20.346 H1_TDA5.1@-19.87,-20.76 -17.68,-20.76 v1(-16.68,-21.76) ; v1(-2.61,-16.26) -2.57,-16.26 -2.297,-15.987 -2.297,-14.327 -0.315,-12.345 -0.315,6.415 v1(-0.46,6.56)
SELECT6: H1_TDA6.1 H2_TDA6.1 TDA5340_TDA6.16 XMC4500.121 | length 55.9
  Top Layer w0.254: TDA5340_TDA6.16@-38.049,27.54 -37.68,28.178 -37.107,28.332 -36.286,27.857 -35.92,26.491 -33.136,24.884 -32.487,22.462 -34.6,18.801 -34.234,17.435 -32.851,16.636 -32.437,15.091 H2_TDA6.1@-31.622,14.621 ; v1(-9.97,6.27) -4.91,6.27 -1.823,9.357 -1.823,10.577 XMC4500.121@-1.8,10.6
  Bottom Layer w0.254: H2_TDA6.1@-31.622,14.621 -29.145,13.191 -28.505,13.362 -27.6,13.605 -25.974,12.666 H1_TDA6.1@-25.56,11.121 -25.535,11.096 -23.054,11.096 -18.607,6.649 -18.607,6.217 -18.36,5.97 -17.61,5.97 -17.31,6.27 v1(-9.97,6.27)
STATUSLED1: D4.2 XMC4500.101 | length 24.7
  Top Layer w0.254: XMC4500.101@6.05,5.25 6.073,5.273 6.923,5.273 7.202,5.552 7.202,12.996 6.835,13.363 6.835,16.935 v1(7.11,17.21) ; v1(9.84,26.38) D4.2@11.07,26.38
  Bottom Layer w0.254: v1(7.11,17.21) 7.11,23.65 v1(9.84,26.38)
STATUSLED2: D5.2 XMC4500.100 | length 23.5
  Top Layer w0.254: XMC4500.100@6.05,4.75 6.073,4.773 7.065,4.773 7.796,5.504 7.796,13.045 7.289,13.552 7.289,16.089 v1(7.55,16.35) ; v1(9.82,24.4) 11.04,24.4 D5.2@11.06,24.42
  Bottom Layer w0.254: v1(7.55,16.35) 7.797,16.597 7.797,22.377 v1(9.82,24.4)
STATUSLED3: D6.2 XMC4500.99 | length 22.1
  Top Layer w0.254: XMC4500.99@6.05,4.25 7.184,4.25 8.25,5.316 8.25,13.233 7.743,13.74 7.743,15.12 8.27,15.647 v1(8.27,15.78) ; v1(9.8,22.44) D6.2@11.05,22.44
  Bottom Layer w0.254: v1(8.27,15.78) 8.27,20.91 v1(9.8,22.44)
STATUSLED4: D7.2 XMC4500.98 | length 20.5
  Top Layer w0.254: XMC4500.98@6.05,3.75 6.073,3.773 7.349,3.773 8.78,5.204 8.78,13.66 8.43,14.01 v1(8.43,14.85) ; v1(9.86,20.39) 10.96,20.39 D7.2@11.04,20.47
  Bottom Layer w0.254: v1(8.43,14.85) 9.097,15.517 9.097,19.627 v1(9.86,20.39)
STATUSLED5: D8.2 XMC4500.97 | length 25.2
  Top Layer w0.254: v1(4.32,3.58) 4.65,3.25 XMC4500.97@6.05,3.25 ; D8.2@11.13,18.42 v1(12.02,18.42) ; v1(11.758,7.745) 11.673,7.66 11.673,11.551 14.69,14.568 v1(14.69,14.85)
  Bottom Layer w0.254: v1(4.32,3.58) 6.831,3.58 10.996,7.745 v1(11.758,7.745) ; v1(12.02,18.42) 14.51,15.93 14.69,15.75 v1(14.69,14.85)
STATUSLED6: D9.2 XMC4500.96 | length 22.8
  Top Layer w0.254: v1(3.5,2.96) 3.5,2.76 3.51,2.75 XMC4500.96@6.05,2.75 ; D9.2@11.06,16.57 11.937,15.693 11.937,13.915 11.081,13.059 11.081,7.149 v1(11.31,6.92)
  Bottom Layer w0.254: v1(3.5,2.96) 3.65,2.81 6.703,2.81 10.813,6.92 v1(11.31,6.92)
STATUSLED7: D10.2 XMC4500.95 | length 20.1
  Top Layer w0.254: v1(3.73,2.05) 4.17,2.05 4.37,2.25 XMC4500.95@6.05,2.25 ; v1(10.86,5.95) 10.627,6.183 10.627,14.217 D10.2@11.06,14.65
  Bottom Layer w0.254: v1(3.73,2.05) 3.911,2.231 6.766,2.231 ; 6.785,2.25 10.485,5.95 v1(10.86,5.95)
TCK: JTAG.3 XMC4500.93 | length 31.1
  Top Layer w0.254: JTAG.3@1.21,20.5 2.287,19.423 6.719,19.423 9.719,16.423 9.719,3.269 v1(8.75,2.3) v1@8.85,2.2 ; v1(4.7,1.1) 4.85,1.25 XMC4500.93@6.05,1.25
  Bottom Layer w0.254: v1(4.7,1.1) 4.7,1.05 7.8,1.05 8.75,2 v1(8.75,2.3)
TMS: JTAG.1 XMC4500.92 | length 26.9
  Top Layer w0.254: JTAG.1@3.75,20.5 4.275,20.5 4.898,19.877 6.907,19.877 10.173,16.611 10.173,2.766 9.03,1.623 7.861,1.623 7.173,0.935 7.173,0.806 7.117,0.75 XMC4500.92@6.05,0.75
"VDD (3,3V)": C5.2 C6.2 C7.2 C8.2 C101.2 C200.2 C209.2 D201.1 H1_TDA1.2 H1_TDA2.2 H1_TDA3.2 H1_TDA4.2 H1_TDA5.2 H1_TDA6.2 H2_TDA1.2 H2_TDA2.2 H2_TDA3.2 H2_TDA4.2 H2_TDA5.2 H2_TDA6.2 IC3.14 JTAG.2 L2_TDA1.2 L2_TDA2.2 L2_TDA3.2 L2_TDA4.2 L2_TDA5.2 L2_TDA6.2 L200.2 R1_TDA1.2 R1_TDA2.2 R1_TDA3.2 R1_TDA4.2 R1_TDA5.2 R1_TDA6.2 R2_TDA1.2 R2_TDA2.2 R2_TDA3.2 R2_TDA4.2 R2_TDA5.2 R2_TDA6.2 R3_TDA1.2 R3_TDA2.2 R3_TDA3.2 R3_TDA4.2 R3_TDA5.2 R3_TDA6.2 R11.2 R20.2 R21.2 R22.2 R23.2 R24.2 R25.2 R26.2 R200.2 R201.2 R202.2 R203.2 R204.2 TDA5340_TDA1.6 TDA5340_TDA2.6 TDA5340_TDA3.6 TDA5340_TDA4.6 TDA5340_TDA5.6 TDA5340_TDA6.6 U1.3 XMC4500.18 XMC4500.24 XMC4500.46 XMC4500.48 XMC4500.62 XMC4500.86 XMC4500.126 | length 635.2
  Top Layer w0.254: v1(-48.49,-25.148) R3_TDA5.2@-48.179,-24.968 ; R2_TDA6.2@-47.467,23.077 -46.645,22.602 -46.064,22.757 ; R1_TDA6.2@-46.047,21.737 -45.955,21.395 -45.513,21.14 -45.428,20.824 -44.549,20.316 -43.839,20.507 -43.831,20.48 -43.307,20.177 -42.722,20.334 -42.709,20.356 -42.542,20.4 -40.038,18.955 -39.416,19.121 H2_TDA6.2@-33.822,15.891 -33.059,15.451 -32.866,14.729 -33.056,14.4 -32.974,14.096 -31.401,13.188 -30.92,13.317 -30.745,13.619 -30.159,13.776 H1_TDA6.2@-27.76,12.391 -27.009,12.391 -24.97,14.43 -22.45,14.43 -21.828,13.808 v1(-21.605,13.808) ; R1_TDA6.2@-45.872,22.04 -46.064,22.757 ; TDA5340_TDA6.6@-44.864,24.836 -46.064,22.757 ; v1(-43.67,33.713) R3_TDA6.2@-43.359,33.533 ; TDA5340_TDA5.6@-41.399,-30.621 -40.199,-32.699 ; R2_TDA5.2@-41.177,-33.755 -40.355,-33.28 -40.199,-32.699 ; R1_TDA5.2@-39.482,-32.891 -40.199,-32.699 ; R1_TDA5.2@-39.307,-33.194 -38.965,-33.286 -38.523,-33.03 -38.207,-33.115 -37.328,-32.607 -37.137,-31.897 -37.11,-31.904 -36.586,-31.601 -36.429,-31.017 -36.442,-30.995 -36.397,-30.827 -33.893,-29.382 -33.726,-28.76 H2_TDA5.2@-28.132,-25.53 -27.369,-25.089 -26.648,-25.283 -26.458,-25.612 -26.153,-25.693 -24.58,-24.786 -24.499,-24.481 -24.167,-23.241 H1_TDA5.2@-22.07,-22.03 ; C5.2@-17.3,-0.691 -17.3,0.14 -17.19,0.25 XMC4500.18@-15.15,0.25 ; XMC4500.24@-15.15,-2.75 -15.127,-2.727 -14.277,-2.727 -13.575,-2.025 ; XMC4500.18@-15.127,0.273 -13.71,0.273 -13.56,0.123 ; -13.56,-2.04 v1(-6.63,-8.97) ; -13.56,-2.01 -13.56,0.123 ; XMC4500.46@-8.8,-10.6 -8.8,-11.7 -8.6,-11.9 -7.8,-11.9 ; R11.2@-8.42,26.275 -7.91,25.765 v1(-7.91,25.33) ; XMC4500.48@-7.8,-10.6 -7.8,-11.9 ; R1_TDA1.2@-6.57,50.69 -6.82,50.44 -6.82,49.929 -7.051,49.698 -7.051,48.682 -6.531,48.162 -6.551,48.143 -6.551,47.537 -6.123,47.109 -6.097,47.109 -5.975,46.987 -5.975,44.095 -5.52,43.64 H2_TDA1.2@-5.52,37.18 -5.52,36.299 -6.048,35.771 -6.428,35.771 -6.651,35.548 -6.651,33.732 -5.52,32.601 H1_TDA1.2@-5.52,30.18 ; v1(-6.55,-12.38) -7.32,-12.38 -7.8,-11.9 ; R1_TDA1.2@-6.22,50.69 -5.695,51.215 ; R2_TDA1.2@-6.12,52.59 -6.12,51.64 -5.695,51.215 ; v1(-5.63,4.725) -6.02,5.115 -11.094,5.115 -12.603,3.606 -12.603,0.52 -13,0.123 -13.56,0.123 ; v1(-5.5,12.11) -5.5,12.5 -5.127,12.873 ; v1(-5.03,-54.67) R3_TDA4.2@-5.03,-54.31 ; v1(-4.65,19.25) -4.65,18.703 -5.127,18.226 -5.127,12.873 ; v1(-4.321,26.437) -4.258,26.437 v1(-4.258,23.717) ; XMC4500.126@-4.3,10.6 -4.323,10.623 -4.323,11.473 -4.55,11.7 C8.2@-4.55,12.5 -4.65,12.6 -4.65,12.873 -5.127,12.873 ; TDA5340_TDA1.6@-3.295,51.215 -5.695,51.215 ; C6.2@-2.4,-12.85 -1.983,-12.85 -0.8,-11.667 XMC4500.62@-0.8,-10.6 -0.823,-10.577 -0.823,-9.727 0.064,-8.84 2.29,-8.84 v1(2.32,-8.87) ; TDA5340_TDA4.6@3.255,-51.265 5.655,-51.265 ; JTAG.2@3.75,17.96 4.008,17.702 JTAG.2@4.373,17.702 ; R202.2@4.4,-20.4 5.172,-21.172 D201.1@6,-21.172 6.472,-21.172 6.55,-21.094 7.15,-21.694 C209.2@7.15,-22.55 6.3,-23.4 6.3,-25.35 6.827,-25.877 8.623,-25.877 L200.2@9.75,-24.75 ; v1(4.708,-2.073) 4.885,-2.25 XMC4500.86@6.05,-2.25 C7.2@7.35,-2.25 ; R3_TDA1.2@4.99,54.26 v1(4.99,54.62) ; H1_TDA4.2@5.48,-30.23 5.48,-32.728 6.557,-33.805 6.589,-33.805 6.611,-33.782 6.611,-35.598 6.388,-35.821 6.008,-35.821 5.48,-36.349 5.48,-43.69 5.935,-44.145 5.935,-47.037 6.057,-47.159 6.083,-47.159 6.511,-47.587 6.511,-48.193 6.491,-48.212 7.011,-48.732 7.011,-49.748 6.78,-49.979 6.78,-50.49 R1_TDA4.2@6.53,-50.74 ; v1(5.504,23.845) 8.977,27.318 14.016,27.318 16.2,25.134 R20.2@16.2,24.63 ; v1(5.86,-11.04) 5.82,-11.08 5.82,-11.97 R203.2@6.1,-12.25 8.79,-12.25 9.137,-12.597 9.137,-13.813 ; R2_TDA4.2@6.08,-52.64 6.08,-51.69 5.655,-51.265 ; R1_TDA4.2@6.18,-50.74 5.655,-51.265 ; v1(7.38,-26.66) 7.38,-25.947 ; C7.2@7.5,-2.4 7.73,-2.4 v1(7.73,-2.43) ; IC3.14@9.1,-14.75 9.1,-13.85 9.137,-13.813 ; v1(9.82,-13.47) 9.48,-13.47 9.137,-13.813 ; v1(12.81,-12.36) 12.81,-11.44 R204.2@12.85,-11.4 ; R24.2@16.23,18.51 R23.2@16.23,20.49 R20.2@16.23,24.6 ; R26.2@16.25,15.98 R25.2@16.25,17.26 ; R24.2@16.25,18.49 R25.2@16.25,17.26 ; R200.2@21.93,9.99 R201.2@20.76,9.99 20.76,14.46 17.96,17.26 R25.2@16.25,17.26 ; H1_TDA2.2@22.07,22.049 24.167,23.259 24.499,24.5 24.581,24.804 26.153,25.712 26.458,25.631 26.648,25.302 27.369,25.108 H2_TDA2.2@28.132,25.549 33.727,28.779 33.893,29.4 36.397,30.846 36.442,31.013 36.429,31.035 36.586,31.62 37.111,31.923 37.138,31.916 37.328,32.626 38.207,33.134 38.523,33.049 38.966,33.305 R1_TDA2.2@39.307,33.213 ; H1_TDA3.2@27.54,-12.471 29.636,-13.682 30.877,-13.349 31.181,-13.268 32.754,-14.176 32.836,-14.48 32.646,-14.809 32.839,-15.531 H2_TDA3.2@33.602,-15.971 39.196,-19.201 39.818,-19.035 42.322,-20.48 42.489,-20.436 42.502,-20.414 43.087,-20.257 43.611,-20.56 43.619,-20.587 44.329,-20.396 45.208,-20.904 45.293,-21.22 45.735,-21.475 R1_TDA3.2@45.827,-21.817 ; R1_TDA2.2@39.482,32.91 40.199,32.718 ; R2_TDA2.2@41.178,33.773 40.355,33.298 40.199,32.718 ; TDA5340_TDA2.6@41.399,30.639 40.199,32.718 ; R3_TDA3.2@43.139,-33.613 v1(43.45,-33.793) ; TDA5340_TDA3.6@44.644,-24.916 45.844,-22.837 ; R1_TDA3.2@45.652,-22.12 45.844,-22.837 ; R2_TDA3.2@47.247,-23.157 46.425,-22.682 45.844,-22.837 ; R3_TDA2.2@48.179,24.987 v1(48.491,25.167)
  Top Layer w0.4: v1(-9.074,12.11) v1(-5.5,12.11)
  Top Layer w0.5: U1.3@-14.565,17 -14.565,16.07 C101.2@-12.995,14.5 v1(-13.9,14.5)
  Bottom Layer w0.254: v1(-52.49,-30.24) -53.08,-29.218 -52.63,-27.538 v1(-48.49,-25.148) -47.444,-24.544 -47.177,-23.546 -46.281,-23.029 -45.696,-23.185 -40.524,-32.145 -40.656,-32.638 v1(-40.083,-33.631) ; v1(-50.08,34.631) -49.49,35.653 -47.81,36.103 v1(-43.67,33.713) -42.624,33.109 -41.626,33.377 -40.73,32.86 -40.574,32.275 -45.746,23.315 -46.24,23.183 v1(-46.813,22.191) ; H1_TDA5.2@-22.07,-22.03 -22.07,-22.112 -19.972,-22.112 -17.617,-24.467 -8.592,-24.467 -7.347,-23.222 -7.347,-15.4 -6.337,-14.39 -6.329,-14.39 -6.329,-12.38 v1(-6.55,-12.38) ; v1(-21.605,13.808) -18.572,13.808 -17.83,14.55 v1@-13.95,14.55 ; v1(-7.91,25.33) -7.296,25.33 -6.597,26.029 ; v1(-6.63,-8.97) -6.319,-9.281 v1@-6.319,-12.39 ; v1(-6.56,51.58) -5.414,51.58 -5.053,51.219 5.293,51.219 5.721,51.647 5.721,52.681 4.99,53.412 v1(4.99,54.62) 4.99,59.4 3.76,60.63 v1(2.58,60.63) ; v1(-5.63,4.725) -5.63,7.78 -5.58,7.83 ; H1_TDA1.2@-5.52,30.18 -6.597,29.103 -6.597,26.029 ; v1(-5.5,12.11) -5.58,12.19 -5.58,7.83 ; v1(-4.321,26.437) -4.383,26.375 -6.251,26.375 -6.597,26.029 ; v1(-4.258,23.717) -4.258,23.712 -3.287,23.712 -2.734,23.159 ; v1(-2.62,-60.68) -3.8,-60.68 -5.03,-59.45 v1(-5.03,-54.67) -5.03,-53.462 -5.761,-52.731 -5.761,-51.697 -5.333,-51.269 5.013,-51.269 5.374,-51.63 v1(6.52,-51.63) ; JTAG.2@3.75,17.96 2.84,17.96 1.55,19.25 v1(-4.65,19.25) -4.65,19.46 -4.947,19.757 -4.947,20.946 -2.734,23.159 ; v1(4.708,-2.073) 4.85,-2.215 2.35,-2.215 2.095,-2.47 ; H1_TDA4.2@5.48,-30.23 7.31,-28.4 7.31,-26.73 v1(7.38,-26.66) 7.333,-26.613 5.853,-26.613 3.985,-24.745 3.985,-18.53 4.503,-18.012 4.503,-17.49 6.928,-15.065 9.337,-15.065 10.376,-14.026 v1(9.82,-13.47) ; v1(5.86,-11.04) 5.627,-10.807 5.627,-10.54 5.23,-10.143 3.503,-10.143 2.32,-8.96 v1(2.32,-8.87) 2.095,-8.645 2.095,-2.47 ; v1(7.73,-2.43) 7.74,-2.42 7.866,-2.546 9.053,-2.546 14.286,-7.779 15.169,-7.779 16.072,-8.682 19.394,-8.682 20.313,-9.601 25.501,-9.601 27.54,-11.639 H1_TDA3.2@27.54,-12.471 ; 10.424,-14.026 12.09,-12.36 v1(12.81,-12.36) ; H1_TDA2.2@22.07,22.049 22.07,22.13 17.73,22.13 10.08,29.78 6.481,29.78 5.717,29.016 5.717,24.209 4.667,23.159 -2.734,23.159 ; v1(40.083,33.649) 40.656,32.657 40.524,32.164 45.697,23.204 46.282,23.047 47.177,23.564 47.444,24.563 v1(48.491,25.167) 52.63,27.557 53.08,29.237 v1(52.49,30.259) ; v1(46.593,-22.271) 46.02,-23.263 45.526,-23.395 40.354,-32.355 40.51,-32.94 41.406,-33.457 42.404,-33.189 v1(43.45,-33.793) 47.59,-36.183 49.27,-35.733 v1(49.86,-34.711) ; -5.58,7.83 -3.973,9.437 1.762,9.437 2.627,8.572 2.627,4.76 2.095,4.227 2.095,-2.47
  Bottom Layer w0.4: v1@-13.95,14.5 -13.95,12.9 -13.16,12.11 v1(-9.074,12.11)
pads on no net: F1_TDA1.1@-1.72,55.04 F1_TDA1.3 F1_TDA1.4 F1_TDA2.1@45.499,31.188 F1_TDA2.3 F1_TDA2.4 F1_TDA3.1@47.169,-28.192 F1_TDA3.3 F1_TDA3.4 F1_TDA4.1@1.68,-55.09 F1_TDA4.3 F1_TDA4.4 F1_TDA5.1@-45.499,-31.169 F1_TDA5.3 F1_TDA5.4 F1_TDA6.1@-47.389,28.112 F1_TDA6.3 F1_TDA6.4 J1.4 J1.SH JTAG.5 JTAG.7 JTAG.8 T1. T1.7 TDA5340_TDA1.1 TDA5340_TDA1.26 TDA5340_TDA2.1 TDA5340_TDA2.26 TDA5340_TDA3.1 TDA5340_TDA3.26 TDA5340_TDA4.1 TDA5340_TDA4.26 TDA5340_TDA5.1 TDA5340_TDA5.26 TDA5340_TDA6.1 TDA5340_TDA6.26 XMC4500.7 XMC4500.8 XMC4500.9 XMC4500.10 XMC4500.13 XMC4500.20 XMC4500.21 XMC4500.25 XMC4500.26 XMC4500.27 XMC4500.28 XMC4500.29 XMC4500.30 XMC4500.31 XMC4500.32 XMC4500.33 XMC4500.34 XMC4500.35 XMC4500.36 XMC4500.37 XMC4500.38 XMC4500.39 XMC4500.40 XMC4500.41 XMC4500.42 XMC4500.43 XMC4500.44 XMC4500.49 XMC4500.50 XMC4500.51 XMC4500.52 XMC4500.55 XMC4500.56 XMC4500.57 XMC4500.58 XMC4500.59 XMC4500.60 XMC4500.63 XMC4500.64 XMC4500.81 XMC4500.84 XMC4500.94 XMC4500.102 XMC4500.103 XMC4500.104 XMC4500.106 XMC4500.108 XMC4500.109 XMC4500.117 XMC4500.122 XMC4500.123 XMC4500.124 XMC4500.127 XMC4500.128 XMC4500.129 XMC4500.130 XMC4500.131 XMC4500.132 XMC4500.133 XMC4500.134 XMC4500.135 XMC4500.136 XMC4500.137 XMC4500.138 XMC4500.139 XMC4500.140

## Polygon pours and split planes (outlines as drawn)
GND on Top Layer "Top Layer- GND" (solid, pour order 37): -34.972,13.899 -27.222,27.323 -54.034,42.803 -61.784,29.379
GND on Top Layer "Top Layer- GND" (solid, pour order 38): -26.982,-27.522 -34.732,-14.098 -61.544,-29.578 -53.794,-43.002
GND on Top Layer "Top Layer- GND" (solid, pour order 39): 7.78,-37.23 -7.72,-37.23 -7.72,-68.19 7.78,-68.19
GND on Top Layer "Top Layer- GND" (solid, pour order 40): 34.752,-13.979 27.002,-27.403 53.814,-42.883 61.564,-29.459
GND on Top Layer "Top Layer- GND" (solid, pour order 41): 26.982,27.541 34.732,14.117 61.544,29.597 53.794,43.021
GND on Top Layer "Top Layer- GND" (solid, pour order 42): -7.82,37.18 7.68,37.18 7.68,68.14 -7.82,68.14
GND on Top Layer "GND_L01_P058" (solid, pour order 58): -30.63,9.68 -21.72,25.11 -19.16,26.56 -10.97,31.283 10.97,31.3 21.72,25.11 31.08,8.91 35.27,8.91 35.27,-9.16 30.67,-9.16 21.35,-25.32 10.97,-31.3 -10.97,-31.3 -21.35,-25.31 -30.62,-9.26
GND on Bottom Layer "Bottom Layer- GND" (solid, pour order 43): -34.972,13.899 -27.222,27.323 -54.034,42.803 -61.784,29.379
GND on Bottom Layer "Bottom Layer- GND" (solid, pour order 44): -26.982,-27.522 -34.732,-14.098 -61.544,-29.578 -53.794,-43.002
GND on Bottom Layer "Bottom Layer- GND" (solid, pour order 45): 7.78,-37.23 -7.72,-37.23 -7.72,-68.19 7.78,-68.19
GND on Bottom Layer "Bottom Layer- GND" (solid, pour order 46): 34.752,-13.979 27.002,-27.403 53.814,-42.883 61.564,-29.459
GND on Bottom Layer "Bottom Layer- GND" (solid, pour order 47): 26.982,27.541 34.732,14.117 61.544,29.597 53.794,43.021
GND on Bottom Layer "Bottom Layer- GND" (solid, pour order 48): -7.82,37.18 7.68,37.18 7.68,68.14 -7.82,68.14
GND on Bottom Layer "GND_L02_P064" (solid, pour order 64): -21.72,25.11 -19.16,26.56 -10.97,31.283 10.97,31.3 21.72,25.11 31.08,8.91 35.27,8.91 35.27,-9.16 30.67,-9.16 21.35,-25.32 10.96,-31.31 -10.97,-31.3 -21.35,-25.31 -30.62,-9.26 -30.63,9.69

## Other copper
Top Layer:
  text "TOP" at 10.72,-30.9 h1.52 r30
Bottom Layer:
  text "BOT" at 14.24,-28.87 h1.52 r30

## Silkscreen, mask and mechanical layers (free items; w line width, h text height)
Top Overlay:
  text "TDA1" at 6.78,39.14 h1.52 r90
  text "TDA6" at -29.369,27.523 h1.52 r150
  text "TDA2" at 35.98,15.877 h1.52 r30
  text "TDA5" at -35.979,-15.858 h1.52 r210
  text "v1.0" at -19.85,-25.4 h1.52 r330
  text "TDA3" at 29.149,-27.603 h1.52 r330
  text "TDA4" at -6.82,-39.19 h1.52 r270
Mechanical 1:
  lines w1: -8.35,31.53 -8.35,31.55
Mechanical 4:
  the board outline again, w0.05
Mechanical 16:
  drawing of 1870 lines, arcs and shapes, not listed
  text "1" at -104.254,85.611 h1.78
  text "2" at -31.61,85.611 h1.78
  text "3" at 41.542,85.611 h1.78
  text "4" at 114.44,85.611 h1.78
  text "A" at -138.595,62.599 h1.78
  text "A" at 148.425,62.599 h1.78
  text "B" at -138.595,14.542 h1.78
  text "C" at -138.595,-33.972 h1.78
  text "ENGINEER:" at 33.49,-70.98 h1.14
  text "TITLE:" at 71.59,-70.98 h1.14
  text "Christof Pfannenmueller" at 34.38,-73.93 h1.52
  text "Basistation PCB Layout" at 76.225,-76.24 h2
  text "PCB DESIGNER:" at 33.49,-78.473 h1.14
  text "D" at -138.595,-81.978 h1.78
  text "D" at 148.425,-81.978 h1.78
  text "DATE:" at 33.49,-86.22 h1.14
  text "PART NO.:" at 71.59,-86.22 h1.14
  text "REV:" at 124.93,-86.22 h1.14
  text "Altium Limited" at 0.47,-88.76 h1.78
  text ".PRINT_DATE" at 34.76,-89.268 h1.78
  text "12a Rodborough Rd" at 0.47,-91.3 h1.78
  text "Frenchs Forest" at 0.47,-93.84 h1.78
  text "FILE NAME:" at 33.49,-93.84 h1.14
  text "DWG NO:" at 71.59,-93.84 h1.14
  text "SCALE:" at 124.93,-93.84 h1.14
  text "NSW 2086" at 0.47,-96.38 h1.78
  text ".PCB_FILE_NAME_NO_PATH" at 34.76,-96.888 h1.78
  text "1" at -104.254,-102.349 h1.78
  text "2" at -31.61,-102.349 h1.78
  text "3" at 41.542,-102.349 h1.78
  text "4" at 114.44,-102.349 h1.78

## Text inside footprints (layer, text, board x,y; h text height)
H1_TDA1: Top Overlay "10" at 6.164,29.672 h1.27; Top Overlay "9" at 6.164,27.132 h1.27; Top Overlay "1" at -7.552,27.132 h1.27; Top Overlay "2" at -8.06,29.672 h1.27
H1_TDA2: Top Overlay "2" at 20.7,24.1 h1.27 r300; Top Overlay "1" at 19.25,22.8 h1.27 r300; Top Overlay "9" at 25.272,10.406 h1.27 r300; Top Overlay "10" at 27.472,11.676 h1.27 r300
H1_TDA3: Top Overlay "2" at 28.37,-10.017 h1.27 r240; Top Overlay "1" at 25.916,-9.187 h1.27 r240; Top Overlay "9" at 19.058,-21.066 h1.27 r240; Top Overlay "10" at 21.258,-22.336 h1.27 r240
H1_TDA4: Top Overlay "2" at 8.02,-29.722 h1.27 r180; Top Overlay "1" at 7.512,-27.182 h1.27 r180; Top Overlay "9" at -6.204,-27.182 h1.27 r180; Top Overlay "10" at -6.204,-29.722 h1.27 r180
H1_TDA5: Top Overlay "2" at -20.36,-23.976 h1.27 r120; Top Overlay "1" at -18.414,-22.266 h1.27 r120; Top Overlay "9" at -25.272,-10.387 h1.27 r120; Top Overlay "10" at -27.472,-11.657 h1.27 r120
H1_TDA6: Top Overlay "2" at -28.59,9.937 h1.27 r60; Top Overlay "1" at -26.136,9.107 h1.27 r60; Top Overlay "9" at -19.278,20.986 h1.27 r60; Top Overlay "10" at -21.478,22.256 h1.27 r60
H2_TDA1: Top Overlay "10" at 6.164,36.672 h1.27; Top Overlay "9" at 6.164,34.132 h1.27; Top Overlay "1" at -7.552,34.132 h1.27; Top Overlay "2" at -8.06,36.672 h1.27
H2_TDA2: Top Overlay "2" at 26.422,27.495 h1.27 r300; Top Overlay "1" at 24.477,25.785 h1.27 r300; Top Overlay "9" at 31.335,13.906 h1.27 r300; Top Overlay "10" at 33.534,15.176 h1.27 r300
H2_TDA3: Top Overlay "2" at 34.432,-13.517 h1.27 r240; Top Overlay "1" at 31.978,-12.687 h1.27 r240; Top Overlay "9" at 25.12,-24.566 h1.27 r240; Top Overlay "10" at 27.32,-25.836 h1.27 r240
H2_TDA4: Top Overlay "2" at 8.02,-36.722 h1.27 r180; Top Overlay "1" at 7.512,-34.182 h1.27 r180; Top Overlay "9" at -6.204,-34.182 h1.27 r180; Top Overlay "10" at -6.204,-36.722 h1.27 r180
H2_TDA5: Top Overlay "2" at -26.422,-27.476 h1.27 r120; Top Overlay "1" at -24.476,-25.766 h1.27 r120; Top Overlay "9" at -31.334,-13.887 h1.27 r120; Top Overlay "10" at -33.534,-15.157 h1.27 r120
H2_TDA6: Top Overlay "2" at -34.652,13.437 h1.27 r60; Top Overlay "1" at -32.198,12.607 h1.27 r60; Top Overlay "9" at -25.34,24.486 h1.27 r60; Top Overlay "10" at -27.54,25.756 h1.27 r60
JTAG: Top Overlay "2" at 6.29,18.468 h1.27 r180; Top Overlay "1" at 5.782,21.008 h1.27 r180; Top Overlay "7" at -5.394,21.008 h1.27 r180; Top Overlay "8" at -5.394,18.468 h1.27 r180
T1: Top Overlay "12" at 28.7,6.475 h0.5 r270; Top Overlay "11" at 30.3,3.875 h0.5 r270; Top Overlay "10" at 28.7,-3.625 h0.5 r270; Top Overlay "9" at 30.3,-6.325 h0.5 r270; Top Overlay "8" at 16.5,4.375 h0.5 r270; Top Overlay "7" at 19,2.975 h0.5 r270; Top Overlay "6" at 16.5,1.875 h0.5 r270; Top Overlay "5" at 19,0.575 h0.5 r270; Top Overlay "4" at 16.5,-0.625 h0.5 r270; Top Overlay "3" at 19,-1.825 h0.5 r270; Top Overlay "2" at 16.5,-3.225 h0.5 r270; Top Overlay "1" at 19.1,-4.525 h0.5 r270